# Altium PCB Smart_DCDC_v5.PCBDOC (part 2 of 2)
Units mm, origin at the board's own origin, x right, y up, seen from the top; angles counter-clockwise.
Board outline 122.55 x 122.29 mm, 2 copper layers (Top Layer, Bottom Layer); 183 components, 138 nets, 550 pads, 99 vias.
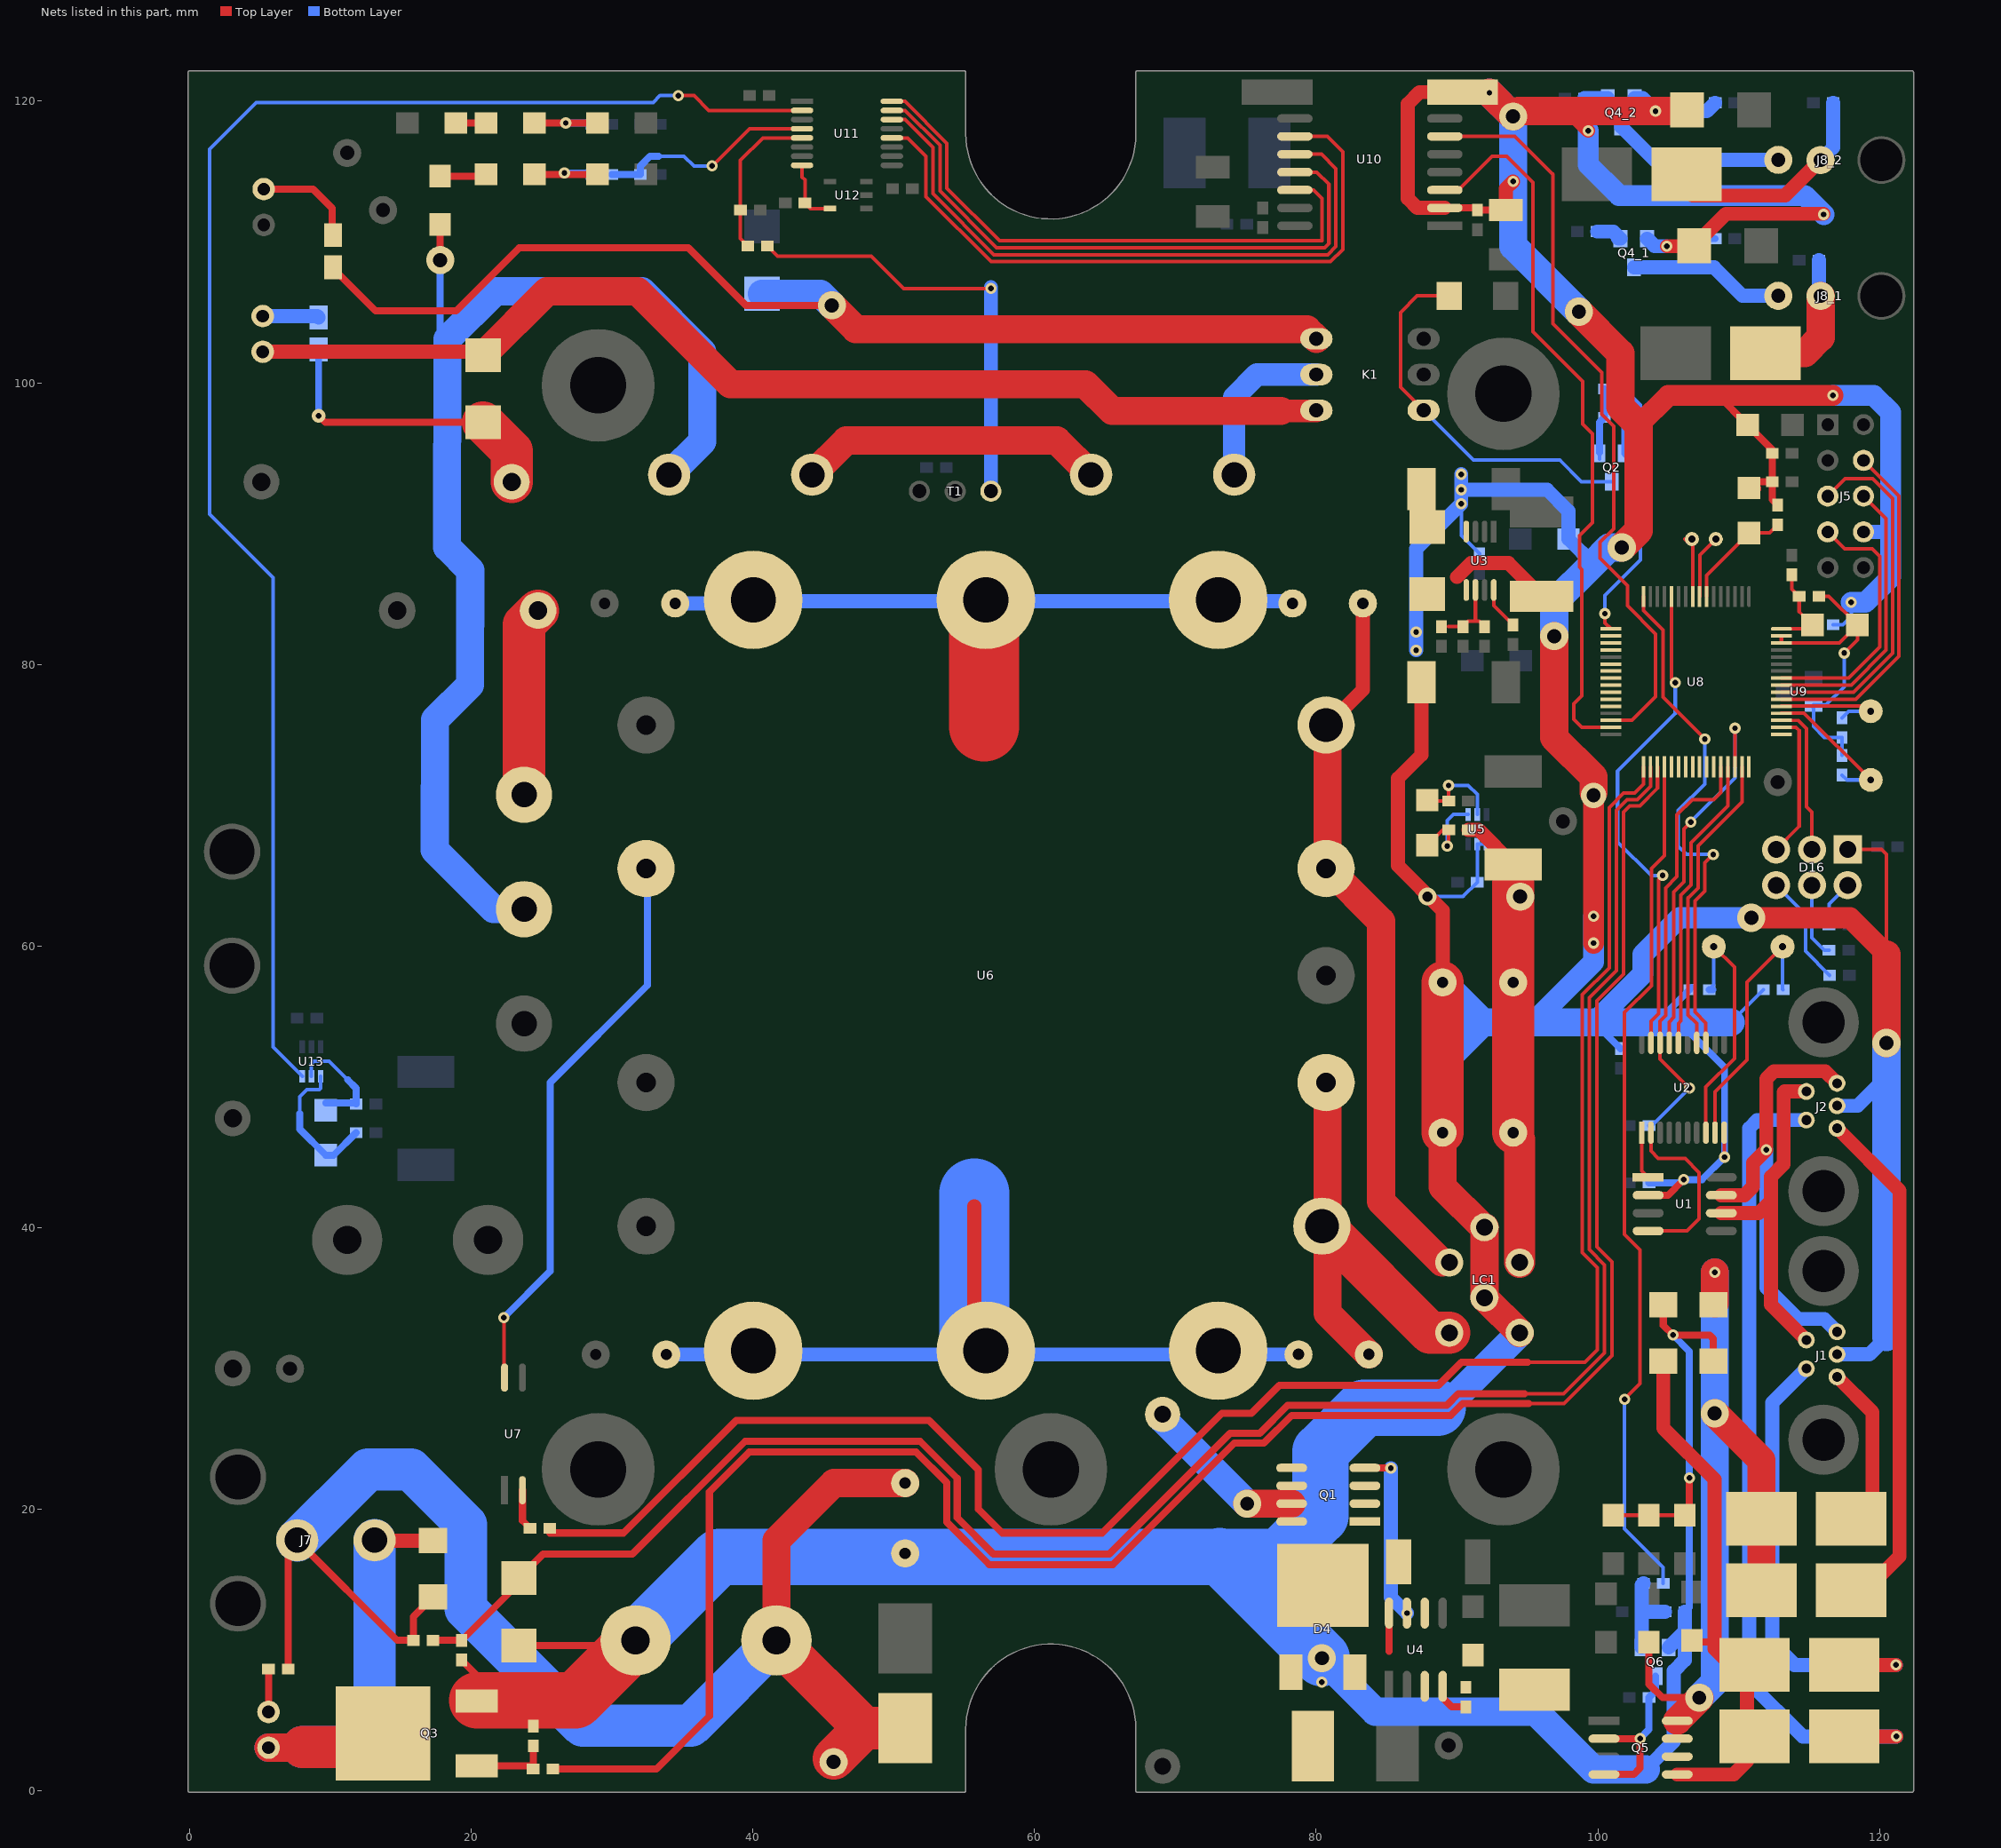
[diagram p2: the nets of this part, all layers, seen from the top]

## Via types
v1: diameter 0.8, hole 0.4, Top Layer to Bottom Layer, 80 vias
v2: diameter 2, hole 1, Top Layer to Bottom Layer, 14 vias
v3: diameter 1.27, hole 0.711, Top Layer to Bottom Layer, 3 vias
v4: diameter 1, hole 0.4, Top Layer to Bottom Layer, 1 vias
v5: diameter 1.8, hole 1, Top Layer to Bottom Layer, 1 vias

## Nets (pads, with @x,y where several pads share a name; then routed paths per layer and width w, separated by ;. In a path a pad name is that pad's centre, name@x,y a point inside that pad or via, vN(x,y) a via of type N, cw(c..) or ccw(c..) an arc to the next point about the centre after c; other vN are vias at no path point) (continued)
CAN+5V: D1.K F1.2 F3.2 Q5.5 Q5.6 R33.1 | length 37.9
  Top Layer w0.508: R33.1@106.68,10.544 108.3,10.544
  Top Layer w1: D1.K@104.648,30.512 104.648,25.752 108.3,22.1 108.3,10.544 108.3,10.064 110.285,8.079 110.6,7.764 110.6,3.844 110.6,2.1 109.643,1.143 Q5.5@105.64,1.143
CAN+12V: D2.K F2.2 F4.2 Q5.7 Q5.8 R35.1 | length 57.5
  Top Layer w0.508: R35.1@103.632,10.544 103.632,7.568 104.6,6.6 v2(107.2,6.6) ; v2@106.644,6.556 107.2,6.556 v2@107.243,6.556 ; v2@107.45,6.85 v2@107.744,6.556
  Top Layer w2: Q5.8@105.64,4.953 v2@107.243,6.556 ; v2(108.3,26.8) 111.623,23.477 F2.2@111.623,19.304 111.623,15.24 112.131,14.732 F4.2@112.639,14.224 ; D2.K@108.3,34.608 v1(108.3,36.82)
  Bottom Layer w2: v2(107.2,6.6) 108.3,7.7 v2(108.3,26.8) v1(108.3,36.82)
CAN_H: J1.4 J2.4 U1.7 | length 32.3
  Top Layer w1: U1.7@108.772,42.291 110.411,42.291 111.02,42.9 111.02,44.58 v1(111.965,45.525) 111.965,50.565 112.5,51.1 116.137,51.1 J2.4@116.992,50.244
  Bottom Layer w1: v1(111.965,45.525) 111.965,35.735 114.2,33.5 116.081,33.5 J1.4@116.992,32.588
CAN_L: J1.5 J2.5 U1.6 | length 24.5
  Top Layer w1: U1.6@108.772,41.021 111.421,41.021 112.3,41.9 ; J1.5@114.808,32.004 112.3,34.512 112.3,41.9 ; J2.5@114.808,49.66 113.26,49.66 113.2,49.6 113.2,44.5 112.3,43.6 112.3,41.9
CAN_SW: R42.1 U8.36 | length 61.2
  Top Layer w0.254: v1(101.9,27.8) 103,28.9 103,38.4 101.9,39.5 101.9,55.286 103.8,57.186 103.8,65.5 104.72,66.42 104.72,72.709 U8.36@104.733,72.72 U8.36@104.739,72.728
  Bottom Layer w0.254: v1(101.9,27.8) 101.9,18.6 104.648,15.852 R42.1@104.648,14.732
CGND: C15.2 C16.2 C20.1 C21.1 U6.0 | length 177.1
  Top Layer w1: U6.0@55.714,31.154 55.714,31.242 55.714,41.514
  Top Layer w5: 56.414,75.586 U6.0@56.414,84.494
  Bottom Layer w1: C15.2@34.464,84.328 40.02,84.328 U6.0@40.234,84.328 ; U6.0@55.714,30.98 U6.0@40.132,30.98 ; C16.2@78.312,84.494 73.04,84.494 U6.0@56.642,84.494 ; C21.1@78.74,30.98 73.04,30.98 U6.0@56.642,30.98 ; U6.0@39.204,30.98 U6.0@40.02,30.98 ; U6.0@39.204,30.98 U6.0@40.02,30.98 ; U6.0@39.204,30.98 C20.1@33.836,30.98 U6.0@39.204,30.98 ; U6.0@39.204,84.494 U6.0@40.02,84.494 ; U6.0@39.204,84.494 U6.0@40.02,84.494 ; U6.0@39.204,84.494 U6.0@40.02,84.494 ; U6.0@40.02,30.98 U6.0@40.132,30.98 ; U6.0@40.02,30.98 U6.0@40.132,30.98 ; U6.0@40.02,84.494 U6.0@40.132,84.494 ; U6.0@40.02,84.494 U6.0@40.132,84.494 ; U6.0@40.02,84.494 U6.0@40.132,84.494 ; U6.0@40.132,30.98 U6.0@56.53,30.98 ; U6.0@40.132,30.98 U6.0@56.53,30.98 ; U6.0@40.132,84.494 U6.0@56.53,84.494 ; U6.0@40.132,84.494 U6.0@56.53,84.494 ; U6.0@56.53,30.98 U6.0@56.642,30.98 ; U6.0@56.53,30.98 U6.0@56.642,30.98 ; U6.0@56.53,84.494 U6.0@56.642,84.494 ; U6.0@56.53,84.494 U6.0@56.642,84.494
  Bottom Layer w5: U6.0@55.714,31.154 55.714,31.242 55.714,42.414
CONTACT_SW: R24.1 U8.35 | length 149.5
  Top Layer w0.254: 95.093,27.492 97.607,27.492 101,30.885 101,37.56 99.92,38.64 99.92,56.106 101.82,58.006 101.82,69.498 102.268,69.946 102.988,69.946 104.239,71.197 104.239,72.72 U8.35@104.239,72.728
  Top Layer w0.508: R24.1@25.784,1.524 33.124,1.524 36.9,5.3 36.9,21.22 39.735,24.055 51.57,24.055 53.755,21.87 53.755,19.07 56.77,16.055 64.106,16.055 65.559,16.055 74.18,24.676 76.28,24.676 78.258,26.654 89.557,26.654 90.395,27.492 95.093,27.492
CONTACT_VREF: D14.K R21.1 R23.1 U8.34 | length 144.4
  Top Layer w0.254: 94.8,28.2 97.58,28.2 100.48,31.1 100.48,37.345 99.4,38.425 99.4,56.321 101.32,58.241 101.32,69.64 102.08,70.4 102.8,70.4 103.739,71.339 103.739,72.72 U8.34@103.739,72.728
  Top Layer w0.508: R21.1@17.272,10.668 R23.1@19.304,10.668 23.368,14.732 D14.K@23.368,15.085 25.083,16.8 31.427,16.8 39.427,24.8 51.879,24.8 54.5,22.179 54.5,19.379 57.079,16.8 63.85,16.8 65.303,16.8 73.887,25.384 75.987,25.384 77.965,27.362 89.263,27.362 90.101,28.2 94.8,28.2
DCDC_SW: R12.1 U8.33 | length 132.2
  Top Layer w0.254: 95.013,30.416 99.089,30.416 99.98,31.307 99.98,37.138 98.9,38.218 98.9,56.528 100.802,58.431 100.802,69.822 101.834,70.854 102.612,70.854 103.239,71.481 103.239,72.72 U8.33@103.239,72.728
  Top Layer w0.508: R12.1@25.557,18.3 30.805,18.3 38.805,26.3 52.5,26.3 56,22.8 56,20 57.7,18.3 63.347,18.3 64.8,18.3 73.3,26.8 75.4,26.8 77.378,28.778 88.677,28.778 90.315,30.416 95.013,30.416
GATEIN: U6.2 U7.4 | length 40.4
  Top Layer w0.254: U7.4@22.3,29.336 v1(22.3,33.6)
  Bottom Layer w0.5: v1(22.3,33.6) 25.6,36.9 25.6,50.3 32.512,57.212 U6.2@32.512,65.492 ; U6.2@32.512,63.485 U6.2@32.512,63.525
GND: C1.1 C2.2 C3.1 C4.1 C5.2 C6.2 C8.2 C9.2 C10.2 C11.2 C12.2 C13.1 C18.2 C19.2 C23.2 C24.2 C25.2 C26.2 C27.2 C28.2 C29.2 C30.2 C31.2 C32.2 C33.2 C34.2 C35.1 C36.1 D1.A D2.A D3.A D4.1 D14.A D15_1.A D15_2.A D16.1 J1.3 J2.3 J5.8 LC1.3 Q2.2 Q3.3 Q4_1.2 Q4_2.2 Q6.2 R16.2 R23.2 R25.1 R27_1.2 R27_2.2 R36.2 R37.2 R38.2 R39.2 R43.1 TP9.0 U1.2 U2.10 U3.4 U4.3 U4.8 U5.1 U5.2 U8.62 U8.63 U9.2 U10.2 U10.8 | length 656.2
  Top Layer w0.254: R36.2@101.092,19.561 R39.2@103.632,19.561 R37.2@106.172,19.561 106.5,19.561 R37.2@106.68,19.561 ; v1@108.974,45.026 U2.10@108.974,46.736 ; U8.63@113.039,82.028 113.039,82.02 113.039,81.528 117.164,81.528 C23.2@118.44,82.804 ; C24.2@115.697,84.836 116.408,84.836 C23.2@118.44,82.804 ; v1(117.5,80.8) 118.44,81.74 C23.2@118.44,82.804 ; D16.1@117.748,66.848 120.152,66.848 120.5,66.5 120.5,59.4
  Top Layer w0.5: U10.2@89.132,112.422 91.44,112.422 91.586,112.422 C36.1@91.59,112.418 ; C36.1@91.44,112.268 C35.1@93.472,112.268 ; U1.2@103.572,42.291 104.991,42.291 v1(106.1,43.4) ; R37.2@106.5,19.561 v1(106.5,22.2)
  Top Layer w0.508: R23.2@19.304,9.271 20.366,8.209 Q3.3@20.366,6.364 ; Q3.3@20.399,6.398 Q3.3@20.986,5.811 ; D14.A@23.368,10.315 C33.2@31.303,10.315 ; 85.171,9.881 U4.8@85.171,12.604 ; D1.A@104.648,34.512 104.648,33.052 v1(105.338,32.362) 107.938,32.362 108.204,32.096 D2.A@108.204,30.512 ; 108.536,99.1 C26.2@110.632,97.004 112.395,95.241 C27.2@112.395,94.996 C32.2@112.395,92.964 ; C28.2@110.744,92.532 111.176,92.964 C32.2@112.395,92.964 ; C28.2@111.343,92.441 C28.2@111.343,92.532 ; C29.2@112.776,91.313 112.395,91.694 C32.2@112.395,92.964
  Top Layer w1: C6.2@87.472,78.74 87.472,73.572 85.8,71.9 85.8,65.7 88.98,62.52 C18.2@88.98,57.404 ; U10.2@89.132,112.422 87.178,112.422 86.5,113.1 86.5,119.8 87.342,120.642 U10.8@90.392,120.642 U10.8@92.3,120.642 ; C35.1@93.472,112.268 93.472,113.792 v1(93.98,114.3) ; 97.92,119.3 v1(99.32,117.9) ; v1(104.9,109.7) 106.807,109.7 D15_1.A@106.835,109.728 109.107,112 v1@116.035,112 ; D15_2.A@106.247,119.3 D15_2.A@106.327,119.38
  Top Layer w1.5: v1(99.7,60.2) v1@99.7,60.52 ; v5@99.7,70.9 v5(99.7,70.7) v1(99.7,62.1) 99.7,61.4 ; 102.9,97 105,99.1 108.536,99.1 v1(116.7,99.1) ; v2(110.9,61.994) 117.906,61.994 120.5,59.4 ; v1@99.7,60.52 99.7,61.4 ; v1@99.7,60.52 99.7,61.4
  Top Layer w2: C19.2@88.98,46.736 88.98,42.88 LC1.3@91.898,39.962 ; LC1.3@91.948,40.012 LC1.3@91.948,35.012 LC1.3@94.448,32.512 ; v1(92.3,120.6) TP9.0@93.98,118.92 94.36,119.3 97.92,119.3 v1(104.1,119.3) D15_2.A@106.247,119.3 ; v2(96.9,82) 96.9,74.8 99.7,72 v5@99.7,70.9 ; v2(98.653,105.047) 101.6,102.1 101.6,98.3 102.9,97 102.9,89.5 v2(101.7,88.3) ; v2(120.5,53.1) 120.5,59.4
  Top Layer w3: C19.2@88.98,46.736 C18.2@88.98,57.404
  Top Layer w4: Q3.3@20.399,6.398 24.384,6.398 27.386,6.398 31.303,10.315 C33.2@31.656,10.668
  Bottom Layer w0.254: v3(87.9,63.5) 90.424,63.5 C13.1@91.44,64.516 U5.2@91.44,67.232 U5.1@92.09,67.232 ; v1(90.3,91.4) 90.3,89.146 C8.2@91.592,87.854 ; 109.426,54.562 C4.1@111.76,56.896 ; U9.2@115.3,76.9 115.316,76.916 115.316,75.584 116.097,74.803 C31.2@117.348,74.803 C30.2@117.348,73.533 ; U9.2@115.316,77.123 116.223,77.123 117.5,78.4 v1(117.5,80.8) ; C25.2@116.713,82.804 117.404,82.804 118,83.4 v1(118,84.4)
  Bottom Layer w0.5: 99.1,54.562 99.743,54.562 C2.2@101.6,52.705 ; C1.1@103.632,43.18 105.88,43.18 v1(106.1,43.4) 107.4,43.4 v1(109,45) 109,51.362 105.8,54.562 ; 104.186,54.562 C3.1@106.52,56.896 C3.1@106.68,57.056 ; v1(104.9,109.7) 106,109.7 106.536,110.236 R27_1.2@108.331,110.236 ; v1(105.338,32.362) 106.5,31.2 v1(106.5,22.2) 106.5,13.028 R43.1@106.172,12.7
  Bottom Layer w0.508: v2(101.7,88.3) 102.3,88.9 Q2.2@102.3,94.625 ; R16.2@101.929,97.481 Q2.2@101.929,94.996 Q2.2@102.3,94.625 ; Q2.2@101.943,94.982 Q2.2@102.3,94.625
  Bottom Layer w1: v1(87.1,81) v1(87.1,82.3) 87.1,88.2 v1(90.3,91.4) v1(90.3,92.4) ; v1(90.3,93.5) v1(90.3,92.4) ; 99.659,87.158 R38.2@97.917,88.9 97.917,90.883 96.4,92.4 v1(90.3,92.4) ; Q4_2.2@102.609,120.212 103.188,120.212 v1(104.1,119.3) 107.743,119.3 R27_2.2@108.331,119.888 ; 103.4,1.5 105.4,3.5 105.4,8.5 106.172,9.272 106.172,11.303 ; Q4_1.2@103.505,110.236 104.041,109.7 v1(104.9,109.7) ; Q6.2@105.029,10.16 106.172,11.303 ; R43.1@106.172,12.7 106.172,11.303 ; J1.3@116.992,30.988 119.288,30.988 120.5,32.2 ; J2.3@116.992,48.644 118.444,48.644 120.5,50.7 ; J5.8@118.872,89.408 120.792,89.408 120.8,89.4
  Bottom Layer w1.5: 95.4,54.562 99.7,58.862 v1(99.7,60.2) v1@99.7,60.52 ; v1(99.32,117.9) 99.32,115.48 101.5,113.3 114.7,113.3 v1(116.042,111.958) ; v1(99.7,62.1) 99.7,61.4 ; 99.743,54.562 103.2,58.019 103.2,59.4 105.794,61.994 v2(110.9,61.994) ; v1(116.7,99.1) 119.6,99.1 120.8,97.9 120.8,89.4 120.8,86.2 119,84.4 v1(118,84.4) ; v1@99.7,60.52 99.7,61.4 ; v1@99.7,60.52 99.7,61.4
  Bottom Layer w2: v2(80.4,9.4) 84.2,5.6 95.6,5.6 99.7,1.5 103.4,1.5 ; C19.2@88.98,46.736 88.98,51.72 91.822,54.562 ; C18.2@88.98,57.404 91.822,54.562 ; 89.136,27.2 LC1.3@94.448,32.512 ; v1(92.3,120.6) TP9.0@93.98,118.92 v1(93.98,114.3) 93.98,109.72 v2(98.653,105.047) ; v2(96.9,82) 96.9,84.4 99.659,87.158 100.8,88.3 v2(101.7,88.3) ; 99.1,54.562 95.4,54.562 91.822,54.562 ; 99.743,54.562 104.186,54.562 105.8,54.562 109.426,54.562 ; 120.5,32.2 120.5,50.7 v2(120.5,53.1)
  Bottom Layer w4: C33.2@31.656,10.668 37.588,16.6 77.4,16.6 80.3,19.5 80.3,24.1 83.4,27.2 88.628,27.2 ; 73.15,16.65 v2(80.4,9.4)
  other v1: 80.4,7.7
HVISENSE: U11.2 U13.6 | length 112.7
  Top Layer w0.254: v1(34.7,120.4) 35.8,120.4 36.854,119.346 U11.2@43.48,119.346
  Bottom Layer w0.254: U13.6@7.986,50.732 5.9,52.818 5.9,86.158 1.4,90.658 1.4,116.6 4.7,119.9 32.9,119.9 33.4,120.4 v1(34.7,120.4)
LEDRED: D16.3 U8.50 | length 10.5
  Top Layer w0.254: D16.3@112.668,66.848 114.3,68.48 114.3,75.3 114.072,75.528 U8.50@113.039,75.528
LEDYLW: D16.2 U8.51 | length 10.8
  Top Layer w0.254: U8.51@113.039,76.028 114.26,76.001 114.808,75.428 114.808,69.892 115.208,69.492 D16.2@115.208,66.848
MCVCC: J6.1 R17.2 R49.1 TP11.0 | length 85.4
  Top Layer w0.508: TP11.0@17.78,108.712 R49.1@17.78,111.252
  Bottom Layer w0.508: TP11.0@17.78,108.712 17.78,103.62 18.3,103.1
  Bottom Layer w2: J6.1@23.735,62.608 21.58,62.613 17.391,66.821 17.413,76.065 19.896,78.536 19.915,86.682 18.266,88.338 18.3,103.1 21.7,106.5 32.1,106.5 36.4,102.2 36.4,95.836 R17.2@34.036,93.472
"MCVCC MEASURE": C45.1 R51.1 U11.4 | length 15.8
  Top Layer w0.254: v1(37.1,115.4) 39.746,118.046 U11.4@43.48,118.046
  Bottom Layer w0.254: 33.296,116.1 35.1,116.1 35.8,115.4 v1(37.1,115.4)
  Bottom Layer w0.508: R51.1@29.972,114.808 C45.1@32.004,114.808 32.004,115.404 32.7,116.1 33.296,116.1
NetC3_2: C3.2 U2.8 Y1.1 | length 18.1
  Top Layer w0.254: U2.8@107.674,46.736 107.674,49.974 109.7,52 109.7,58.485 Y1.1@108.241,59.944
  Bottom Layer w0.254: C3.2@107.917,56.896 108.241,57.22 Y1.1@108.241,59.944
  Bottom Layer w0.5: C3.2@107.917,56.896 C3.2@108.167,56.896
NetC4_2: C4.2 U2.9 Y1.2 | length 18.3
  Top Layer w0.254: U2.9@108.324,46.736 108.324,49.624 110.6,51.9 110.6,57.423 Y1.2@113.121,59.944
  Bottom Layer w0.254: Y1.2@113.121,59.944 113.121,56.932 C4.2@113.157,56.896
NetC7_2: C7.2 R3.2 R4.2 U3.6 | length 5.1
  Top Layer w0.254: 89.408,82.677 C7.2@90.424,82.677 90.8,83.053 91.308,83.053 ; U3.6@91.308,85.282 91.308,83.053 ; R4.2@91.948,82.677 91.572,83.053 91.308,83.053
NetC11_1: C11.1 U4.4 | length 2.7
  Top Layer w0.508: U4.4@88.981,7.404 88.981,6.571 89.612,5.94 C11.1@90.632,5.94
NetC14_1: C14.1 R6.1 U5.4 | length 6.6
  Top Layer w0.254: C14.1@87.884,67.156 88.976,68.248 R6.1@89.408,68.248 89.408,67.208 v1(89.3,67.1)
  Bottom Layer w0.254: v1(89.3,67.1) 89.3,68.9 89.732,69.332 U5.4@90.79,69.332
NetC14_2: C14.2 R7.1 U5.5 | length 6.6
  Top Layer w0.254: C14.2@87.884,70.864 88.138,70.61 88.468,70.28 R7.1@89.408,70.28 89.408,71.392 v1(89.4,71.4)
  Bottom Layer w0.254: v1(89.4,71.4) 90.8,71.4 91.44,70.76 U5.5@91.44,69.332
NetC16_1: C16.1 LC1.1 U6.5 U6.6 | length 52.6
  Top Layer w1: U6.5@79.884,75.604 80.336,76.056 U6.5@80.392,76.112 ; U6.5@80.812,75.692 83.312,78.192 C16.1@83.312,84.328
  Top Layer w2: U6.6@79.884,65.416 80.254,65.046 U6.6@80.29,65.01 ; U6.6@79.884,65.444 79.884,65.492 U6.6@79.884,65.532 ; U6.5@80.812,75.692 80.812,65.532 84.6,61.744 84.6,41.852 LC1.1@88.94,37.512
NetC18_1: C18.1 C19.1 LC1.4 R6.2 R8.2 TP6.0 | length 31.3
  Top Layer w0.254: R6.2@90.8,68.4 R6.2@90.805,68.4
  Top Layer w1: R6.2@90.805,68.248 91.518,68.248 R8.2@93.98,65.786
  Top Layer w2.2: C19.1@93.98,46.736 94.448,46.268 LC1.4@94.448,37.512
  Top Layer w3: C19.1@93.98,46.736 C18.1@93.98,57.404 93.98,64.454
NetC21_2: C21.2 LC1.2 U6.8 U6.9 | length 32.6
  Top Layer w2: U6.8@80.812,50.292 80.812,40.092 80.812,39.792 80.812,33.916 C21.2@83.74,30.988
  Top Layer w3: U6.9@80.512,40.092 80.812,39.792 88.092,32.512 LC1.2@89.448,32.512
NetC22_1: C22.1 R11.2 U13.4 | length 10.3
  Bottom Layer w0.254: 7.8,48.1 7.8,49.3 8.3,49.8 9.2,49.8 9.286,49.886 U13.4@9.286,50.732
  Bottom Layer w0.5: 7.8,48.1 7.8,46.988 C22.1@9.652,45.136 10.211,45.136 R11.2@11.811,46.736
NetC22_2: C22.2 R10.2 U13.5 | length 8.2
  Bottom Layer w0.254: U13.5@8.636,50.732 8.636,51.636 8.8,51.8 9.9,51.8 11.2,50.5
  Bottom Layer w0.5: C22.2@9.652,48.844 11.735,48.844 R10.2@11.811,48.768 11.811,49.889 11.2,50.5
NetC23_1: C23.1 C24.1 R13.1 U8.64 | length 6.5
  Top Layer w0.254: U8.64@113.039,82.528 114.964,82.528 C23.1@115.24,82.804 114.3,83.744 C24.1@114.3,84.836 113.792,85.344 R13.1@113.792,86.36
NetC33_1: C33.1 C34.1 D12.K F6.2 J7.1 R21.2 R22.2 TP12.0 | length 106.7
  Top Layer w0.508: R22.2@6.985,8.636 6.985,17.145 J7.1@7.62,17.78 14.732,10.668 R21.2@15.875,10.668 15.875,12.351 D12.K@17.272,13.748
  Top Layer w2: C33.1@41.656,10.668 41.656,17.756 45.744,21.844 C34.1@50.8,21.844
  Top Layer w3: C33.1@41.656,10.668 47.889,4.435 ; TP12.0@45.72,2.266 47.889,4.435 ; F6.2@50.8,4.435 47.889,4.435
  Bottom Layer w3: J7.1@7.62,17.78 12.64,22.8 15.7,22.8 19.6,18.9 19.6,12.9 27.9,4.6 35.588,4.6 C33.1@41.656,10.668
NetC43_1: C43.1 U11.8 U12.5 | length 5.2
  Top Layer w0.254: U11.8@43.48,115.446 43.48,114.62 43.688,114.412 C43.1@43.688,112.776 44.088,112.376 U12.5@45.462,112.376 45.004,112.376
NetC46_1: C46.1 R53.1 U11.5 | length 11.3
  Top Layer w0.254: R53.1@39.624,109.728 39.1,110.252 39.1,115.8 40.696,117.396 U11.5@43.48,117.396
NetD3_K: D3.K L1.1 U3.5 | length 7.4
  Top Layer w1: 90,86.2 91,87.2 93.648,87.2 L1.1@96.012,84.836
NetD4_2: D4.2 L2.1 Q1.5 Q1.6 Q1.7 Q1.8 | length 12
  Top Layer w2: v2(75.1,20.381) Q1.7@78.256,20.381
  Bottom Layer w2: L2.1@69.088,26.724 69.088,26.393 v2(75.1,20.381)
NetD6_A: D6.A K1.3 Q2.3 | length 27
  Top Layer w0.254: K1.3@87.63,98.044 86,99.674 86,105 87.172,106.172 D6.A@89.44,106.172
  Bottom Layer w0.254: K1.3@87.63,98.044 91.174,94.5 97.3,94.5 98.836,92.964 Q2.3@100.989,92.964
NetD7_A: D7.A D9.K K1.6 | length 80.1
  Top Layer w1: D9.K@5.176,102.2 D7.A@20.7,102.2
  Top Layer w1.6: 77.5,98 K1.6@80.01,98
  Top Layer w2: D7.A@20.828,101.953 25.375,106.5 31.8,106.5 38.4,99.9 63.6,99.9 65.5,98 77.5,98
NetD7_K: D7.K D8.K R19.2 | length 21.6
  Top Layer w0.5: v4(9.144,97.656) 9.617,97.183 D7.K@20.8,97.183
  Top Layer w3: D7.K@20.828,97.183 22.86,95.151 D8.K@22.86,92.964
  Bottom Layer w0.5: v4(9.144,97.656) R19.2@9.144,102.362
NetD9_A: D9.A R19.1 | length 4
  Bottom Layer w1: D9.A@5.176,104.74 9.052,104.74 R19.1@9.144,104.648
NetD10_K: D10.K K1.4 R20.1 | length 81
  Top Layer w0.504: R20.1@10.16,108.14 13.2,105.1 18.9,105.1 23.4,109.6 35.4,109.6 39.5,105.5 v2(45.6,105.5)
  Top Layer w2: v2(45.6,105.5) 47.3,103.8 79.334,103.8 K1.4@80.01,103.124
  Bottom Layer w2: D10.K@40.64,106.327 44.773,106.327 v2(45.6,105.5)
NetD11_A: D11.A R20.2 | length 7.2
  Top Layer w0.508: D11.A@5.248,113.756 8.744,113.756 10.1,112.4 R20.2@10.1,110.6
NetD12_A: D12.A D13.K J7.2 Q3.2 | length 34.6
  Top Layer w1: J7.2@13.152,17.748 D12.A@17.272,17.748
  Top Layer w2: D13.K@5.588,3.048 7.948,3.048 8,3.1
  Top Layer w3: 8,3.1 12.752,3.1 Q3.2@13.716,4.064 Q3.2@13.12,4.66
  Bottom Layer w2: D13.K@5.588,3.048 7.948,3.048 8,3.1
  Bottom Layer w3: 8,3.1 11.1,3.1 13.12,5.12 J7.2@13.12,17.78
NetD13_A: D13.A R22.1 | length 3
  Top Layer w0.508: D13.A@5.588,5.588 R22.1@5.588,8.636
NetD16_4: D16.4 R29.2 | length 8
  Bottom Layer w0.254: D16.4@112.668,64.308 114.754,62.222 114.754,59.617 R29.2@116.459,57.912
NetD16_5: D16.5 R30.2 | length 5.3
  Bottom Layer w0.254: D16.5@115.208,64.308 115.208,60.592 116.096,59.704 R30.2@116.415,59.704
NetD16_6: D16.6 R31.2 | length 3.4
  Bottom Layer w0.254: R31.2@116.415,61.496 116.415,62.975 D16.6@117.748,64.308
NetF1_1: F1.1 J1.1 | length 33.6
  Top Layer w1: F1.1@117.501,8.924 v1(121.176,8.924)
  Bottom Layer w1: J1.1@114.808,29.972 112.4,27.564 112.4,10.5 113.976,8.924 v1(121.176,8.924)
NetF2_1: F2.1 J1.2 | length 11.7
  Top Layer w1: J1.2@116.992,29.388 119.5,26.88 119.5,20.811 F2.1@117.993,19.304
NetF3_1: F3.1 J2.1 | length 59.4
  Top Layer w1: F3.1@117.501,3.844 v1(121.2,3.844)
  Bottom Layer w1: J2.1@114.808,47.628 111.328,47.628 110.75,47.05 110.75,7.65 114.556,3.844 v1(121.2,3.844)
NetF4_1: F4.1 J2.2 | length 35.7
  Top Layer w1: J2.2@116.992,47.044 121.425,42.611 121.425,16.64 F4.1@119.009,14.224
NetF5_2: F5.2 J3.1 | length 13.5
  Top Layer w3: J3.1@23.735,70.736 23.735,82.823 F5.2@24.732,83.82
NetF7_1_2: F7_1.2 J8_1.1 R26_1.2 | length 9.8
  Top Layer w2: F7_1.2@111.897,102.108 114.708,102.108 115.824,103.224 J8_1.1@115.824,106.172
  Bottom Layer w1: J8_1.1@115.697,106.299 R26_1.2@115.697,108.712
NetF7_2_2: F7_2.2 J8_2.1 R26_2.2 | length 16.4
  Top Layer w1: F7_2.2@105.413,114.624 105.769,114.268 106.737,113.3 113.3,113.3 J8_2.1@115.824,115.824
  Bottom Layer w1: J8_2.1@115.824,115.824 116.713,116.713 R26_2.2@116.713,119.888
NetJ8_1_2: J8_1.2 Q4_1.3 | length 11.1
  Bottom Layer w1: Q4_1.3@102.565,108.204 108.252,108.204 110.274,106.182 J8_1.2@112.814,106.182
NetJ8_2_2: J8_2.2 Q4_2.3 | length 12.1
  Bottom Layer w1: Q4_2.3@101.669,118.18 104.015,115.834 J8_2.2@112.814,115.834
NetK1_5: K1.5 R18.1 | length 12
  Bottom Layer w1.6: R18.1@74.168,93.472 74.168,98.968 75.784,100.584 K1.5@80.01,100.584
NetQ1_1: Q1.1 Q1.2 Q1.3 R5.1 U4.6
NetQ1_4: Q1.4 U4.7 | length 12.6
  Top Layer w0.508: Q1.4@83.456,22.921 v1@85.279,22.921
  Bottom Layer w1: v1(85.3,22.9) 85.3,13.745 v1(86.441,12.604)
NetQ2_1: Q2.1 R15.1 R16.1 | length 5.1
  Bottom Layer w0.254: Q2.1@100.128,94.572 Q2.1@100.128,95.044
  Bottom Layer w0.508: Q2.1@100.128,95.044 100.128,97.188 R16.1@100.476,97.536 R15.1@100.476,99.568
NetQ3_1: Q3.1 R24.2 R25.2 | length 5.8
  Top Layer w0.508: Q3.1@20.366,1.764 R24.2@24.147,1.764 ; R25.2@24.384,3.175 24.384,1.764 R24.2@24.147,1.764 ; R24.2@24.387,1.524 R24.2@24.147,1.764
NetQ4_1_1: Q4_1.1 R28_1.2 | length 2.1
  Bottom Layer w1: R28_1.2@99.949,110.744 101.092,110.744 Q4_1.1@101.6,110.236 101.464,110.236 Q4_1.1@101.4,110.3
NetQ4_2_1: Q4_2.1 R28_2.2 | length 1.7
  Bottom Layer w1: R28_2.2@99.053,120.212 Q4_2.1@100.704,120.212
NetQ5_2: Q5.2 Q5.4 Q6.3 R40.1 | length 12.3
  Top Layer w0.508: Q5.4@100.44,1.143 102.543,1.143 103,1.6 v1(103,3.7) ; Q5.2@100.44,3.683 v1@102.983,3.683
  Bottom Layer w0.508: v1(103,3.7) 103.632,4.332 R40.1@103.632,6.604 104.089,7.061 Q6.3@104.089,8.128
NetQ6_1: Q6.1 R41.1 R42.2 R43.2 | length 6.3
  Bottom Layer w1: Q6.1@103.124,10.16 R41.1@103.124,12.7 ; R42.2@103.251,14.732 103.124,14.605 R41.1@103.124,12.7 ; R43.2@104.775,12.7 R41.1@103.124,12.7
NetR2_1: R2.1 U3.8 | length 3
  Top Layer w0.254: U3.8@92.608,85.282 92.608,84.176 R2.1@93.98,82.804
NetR12_2: R12.2 U7.2 | length 2.9
  Top Layer w0.508: U7.2@23.622,21.336 23.622,19.177 R12.2@24.16,18.639
NetR17_1: R17.1 R18.2 | length 21.8
  Top Layer w2: R17.1@44.196,93.472 46.624,95.9 61.58,95.9 R18.2@64.008,93.472
NetR45_2: R45.2 R46.1 | length 2.2
  Top Layer w0.5: R45.2@18.885,118.452 R46.1@21.044,118.452
NetR46_2: R46.2 R47.2 R48.1 | length 6.3
  Top Layer w0.508: R46.2@24.473,118.452 v1(26.7,118.452) R48.1@28.956,118.452
  Bottom Layer w0.508: v1(26.7,118.452) R47.2@28.487,118.452
NetR49_2: R49.2 R50.1 | length 3.3
  Top Layer w0.508: R49.2@17.78,114.681 20.917,114.681 R50.1@21.044,114.808
NetR50_2: R50.2 R51.2 R52.1 | length 6.4
  Top Layer w0.508: R50.2@24.473,114.808 R52.1@28.956,114.808
  Bottom Layer w0.508: v1(26.6,114.9) R51.2@28.483,114.9
NetR53_2: R53.2 T1.2 | length 31.6
  Top Layer w0.254: R53.2@41.021,109.728 41.749,109 48.4,109 50.7,106.7 v1(56.9,106.7)
  Bottom Layer w1: T1.2@56.896,92.299 v1@56.896,106.8
NetU1_1: U1.1 U2.1 | length 3.4
  Top Layer w0.254: U2.1@103.124,46.736 103.124,44.009 U1.1@103.572,43.561
NetU1_4: U1.4 U2.2 | length 12.6
  Top Layer w0.254: U1.4@103.572,39.751 106.351,39.751 107.2,40.6 107.2,43.9 106.2,44.9 104.3,44.9 103.774,45.426 U2.2@103.774,46.736
NetU10_11: U10.11 U11.12 | length 48.5
  Top Layer w0.254: U11.12@49.86,117.396 50.981,117.396 52.274,116.103 52.274,113.226 56.9,108.6 81.021,108.6 81.9,109.479 81.9,116.4 80.798,117.502 U10.11@78.482,117.502
NetU10_12: U10.12 U11.14 | length 46.5
  Top Layer w0.254: U11.14@49.86,118.696 50.798,118.696 52.774,116.72 52.774,113.426 57.1,109.1 80.814,109.1 81.4,109.686 81.4,115.2 80.368,116.232 U10.12@78.482,116.232
NetU10_13: U10.13 U11.15 | length 44.9
  Top Layer w0.254: U11.15@49.86,119.346 50.802,119.346 53.274,116.874 53.274,113.626 57.3,109.6 80.607,109.6 80.9,109.893 80.9,114.1 80.038,114.962 U10.13@78.482,114.962 U10.13@79.338,114.962
NetU10_14: U10.14 U11.16 | length 41.7
  Top Layer w0.254: U11.16@49.86,119.996 50.794,119.996 53.774,117.016 53.774,113.826 57.5,110.1 80.4,110.1 80.4,113.1 79.808,113.692 U10.14@78.482,113.692
P1.0: U2.19 U8.12 | length 35.7
  Top Layer w0.254: U2.19@103.774,53.116 103.774,54.649 104.32,55.195 104.32,64.72 v1(104.6,65)
  Top Layer w0.256: U8.12@105.239,84.828 105.239,84.82 105.239,78.961 v1(105.5,78.7)
  Bottom Layer w0.254: v1(104.6,65) 103.8,65 101.4,67.4 101.4,72.42 105.5,76.52 v1(105.5,78.7)
P1.4: U2.13 U8.16 | length 37.4
  Top Layer w0.254: U8.16@103.239,84.828 103.239,84.82 103.239,83.821 104.62,82.44 104.62,77.68 v1(107.6,74.7) ; U2.13@107.62,53.17 U2.13@107.674,53.116 107.674,54.526 106.9,55.3 106.9,63.2 107.6,63.9 107.6,65.9 v1(108.2,66.5)
  Bottom Layer w0.254: v1(107.6,74.7) 107.6,71.5 105.72,69.62 105.72,67.08 106.3,66.5 v1(108.2,66.5)
P1.5: R15.2 U8.17 | length 18.8
  Top Layer w0.254: v1(100.5,83.6) 100.5,82.954 U8.17@100.933,82.52
  Bottom Layer w0.254: v1(100.5,83.6) 100.5,84.9 103.027,87.427 103.027,98.414 R15.2@101.873,99.568
P1.6: U8.18
P1.7: U8.19
P2.0: U8.20
P2.2: U8.22
P2.3: U8.23
P2.4: U8.24
P2.5: U8.25
P2.6: U8.26
P2.7: U8.27
P3.0: U8.28
P3.2: U8.30 U10.6 | length 53.6
  Top Layer w0.254: U10.6@89.132,117.502 94.108,117.502 96.8,114.81 96.8,104.2 100.273,100.727 100.273,97.75 101.12,96.903 101.12,89.636 100.151,88.667 100.151,88.649 100.151,87.549 100.954,86.746 ; 100.9,86.8 102.1,85.6 102.1,84.16 104.1,82.16 104.1,77.7 102.428,76.028 U8.30@100.939,76.028
P3.3: U8.31 U10.3 | length 51.5
  Top Layer w0.254: U10.3@89.132,113.692 90.1,113.692 92.5,116.092 93.524,116.092 95.39,114.226 95.39,103.616 98.911,100.095 98.911,97.083 99.62,96.374 99.62,90.062 98.7,89.142 98.7,86.9 98.872,86.728 98.872,77.772 98.3,77.2 98.3,76.1 98.872,75.528 U8.31@100.939,75.528
P4.1: U8.37
P4.2: U8.38
P4.3: U8.39
P4.4: U8.40
P4.5: U8.41
P4.6: U8.42
P4.7: U8.43
P5.0: R1.1 U2.18 U8.44 | length 30.3
  Top Layer w0.254: v1(106.5,49.9) 104.424,51.976 U2.18@104.424,53.116 104.424,54.649 104.82,55.045 104.82,64.12 105.62,64.92 105.62,69.32 106.7,70.4 108.238,70.4 108.739,70.901 108.739,72.72 U8.44@108.739,72.728
  Bottom Layer w0.254: R1.1@103.632,47.244 103.844,47.244 v1(106.5,49.9)
P5.1: U2.16 U8.45 | length 21.1
  Top Layer w0.254: U2.16@105.724,53.116 105.724,54.5 105.9,54.676 105.9,63.62 106.62,64.34 106.62,67.34 109.239,69.959 109.239,72.72 U8.45@109.239,72.728
P5.2: U2.17 U8.46 | length 27
  Top Layer w0.254: U2.17@105.074,53.116 105.074,54.594 105.4,54.92 105.4,63.82 106.12,64.54 106.12,68.32 v1(106.6,68.8) ; U8.46@109.739,72.728 v1(109.739,75.461)
  Bottom Layer w0.254: v1(106.6,68.8) 109.739,71.939 v1(109.739,75.461)
P5.3: U2.14 U8.47 | length 21.6
  Top Layer w0.254: U2.14@106.92,53.22 U2.14@107.024,53.116 107.024,54.476 106.4,55.1 106.4,63.4 107.12,64.12 107.12,67.12 110.239,70.239 110.239,72.72 U8.47@110.239,72.728
P5.4: U8.48
P5.5: U8.49
TCK: J5.7 U8.57 | length 18.7
  Top Layer w0.254: U8.57@113.039,79.028 117.808,79.028 120.027,81.247 120.027,87.673 119.5,88.2 117.54,88.2 J5.7@116.332,89.408
TDI: J5.5 U8.55 | length 25.7
  Top Layer w0.254: U8.55@113.039,78.028 118.178,78.028 120.935,80.785 120.935,91.783 119.525,93.193 117.577,93.193 J5.5@116.332,91.948
TDO: J5.4 U8.54 | length 24.6
  Top Layer w0.254: U8.54@113.039,77.528 118.328,77.528 121.389,80.589 121.389,91.971 J5.4@118.872,94.488
TMS: J5.6 U8.56 | length 20.1
  Top Layer w0.254: U8.56@113.039,78.528 118.008,78.528 120.481,81.001 120.481,90.339 J5.6@118.872,91.948
VREF: C28.1 C29.1 U8.7 | length 8
  Top Layer w0.254: U8.7@107.739,84.828 107.739,86.327 C28.1@110.744,89.332 112.192,89.332 C29.1@112.776,89.916
XT1IN: U8.8 Y2.2 | length 4.5
  Top Layer w0.254: U8.8@107.239,84.828 107.239,87.759 Y2.2@108.38,88.9
XT1OUT: U8.9 Y2.1 | length 4.4
  Top Layer w0.254: 106.172,88.9 Y2.1@106.426,88.646 ; U8.9@106.739,84.828 Y2.1@106.739,88.9
XT2IN: C31.1 U8.53 Y3.1 | length 8.7
  Top Layer w0.254: U8.53@113.039,77.028 119.023,77.028 Y3.1@119.38,76.671
  Bottom Layer w0.254: C31.1@117.348,76.2 117.819,76.671 Y3.1@119.38,76.671
XT2OUT: C30.1 U8.52 Y3.2 | length 10.5
  Top Layer w0.254: U8.52@113.039,76.528 114.643,76.528 Y3.2@119.38,71.791
  Bottom Layer w0.254: C30.1@117.348,72.136 117.693,71.791 Y3.2@119.38,71.791
pads on no net: H1.1 H2.1 H3.1 H4.1 H5.1 J1.0 J2.0 J5.1 J5.9 J5.10 J7.0 J8_1.0 J8_2.0 K1.2 U1.5 U1.8 U2.3 U2.4 U2.5 U2.6 U2.7 U2.11 U2.12 U2.15 U3.2 U3.3 U6.3 U6.7 U10.7 U11.13 U12.1

## Polygon pours and split planes (outlines as drawn)
GND on Bottom Layer "POLYGND" (solid, pour order 1000): 2.5,26.5 2.5,25.7 0.4,23.6 0.4,1.9 1.8,0.5 53.1,0.5 54.2,1.6 54.2,6.7 59,11.5 63.3,11.5 68,6.8 68,2.3 69.4,0.9 119.4,0.9 121.5,3 121.5,119.1 119.2,121.4 88,121.4 86.7,120.1 86.7,28.5 84.6,26.4 84.5,26.5 2.5,26.5

## Keep-outs
Keep-Out Layer:
  lines w0.254: 54.98,4.365 54.98,0 0,0 0,122.04 54.98,122.04 54.98,117.675 ; 54.985,4.365 cw(c61.15,4.365) 67.315,4.365 ; 54.985,117.675 ccw(c61.15,117.675) 67.315,117.675 ; 67.31,4.365 67.31,0 122.3,0 122.3,122.04 67.31,122.04 67.31,117.675

## Other copper
Top Layer:
  rectangle net CAN+5V: 104.5,0.7 108,2.8
  rectangle net CAN+12V: 104.4,3.4 108,5.4
  rectangle net GND: 87.2,6.1 88.2,9.1
  rectangle net NetQ1_1: 85.1,18.2 87.1,20.3
  rectangle net NetQ1_1: 82.3,18.152 85.9,22.052
  rectangle net CGND: 37.5,36.3 75.6,79.4
  rectangle net GND: 77.1,0.6 83.6,11.052
  rectangle net GND: 90,6.852 98,10.9
  rectangle net GND: 82.9,8.952 90.1,10.9
  rectangle net NetD4_2: 76.8,16.552 79.7,22.921
  rectangle net NetQ1_1: 87.3,11.452 88.1,18.852
  rectangle net NetQ1_1: 85.1,14.652 88.1,18.852
  rectangle net 12V: 88.5,11.352 98,18.2
  rectangle net GND: 86.5,88.4 90.9,94
  rectangle net 3V3: 92.4,88.6 96.6,94.1
  rectangle net NetD3_K: 86.3,84.4 90.9,86.5
  rectangle net 12V: 89,77.1 95,81.9
  rectangle net GND: 86.2,77.1 87.9,82.9
  rectangle net 12V: 99,4.5 101.7,7.9
  rectangle net GND: 117.4,82 119.7,85
Bottom Layer:
  rectangle net BATTGND: 41.6,111.8 54.4,121.5
  rectangle net BATTGND: 75,107 84.3,121.7
  rectangle net CGND: 37.1,35.9 76.1,79.8

## Silkscreen, mask and mechanical layers (free items; w line width, h text height)
Top Overlay:
  lines w1: 0,27.3 84.4,27.3 85.5,28.4 85.5,33.7 ; 85.5,32 85.5,122.1
  text "BATTVCC" at 7.2,119.3 h0.8
  text "DISCHARGE" at 0.7,116.4 h1
  text "GND" at 93.5,115.5 h0.8
  text "BATTGND" at 11.3,108.8 h0.8
  text "MCVCC" at 14.1,105.4 h0.8
  text "SMART DC-DC 2009" at 32.2,103 h1.6
  text "UNIT 01 - TEST TYPE" at 58.1,102.9 h1
  text "IRVING S. TJIPTOWARSONO &" at 33.7,100.6 h1.52
  text "PRECHARGE" at 0.7,99 h1
  text "DAVID C. A. SNOWDON" at 33.6,98 h1.52
  text "3V3" at 108.7,68.7 h0.8
  text "BATTVCC" at 18.9,67.2 h1
  text "12V" at 99.4,66.4 h0.8
  text "VICOROUT" at 97.1,63.1 h0.8
  text "MCVCC" at 19.4,59 h1
  text "BATTGND" at 19.4,50.9 h1
  text "Solar racing is awesome." at 39.5,37.3 h1.5
  text "-IN" at 8.7,29.5 h0.8
  text "BORDER OF HIGH      AND LOW VOLTAGE" at 35.5,24.4 h1.52
  text "12V" at 121.9,16.4 h1 r90
  text "CAN SIDE" at 121.7,9.8 h0.8 r90
  text "5V" at 121.7,5.5 h1 r90
  text "5V" at 91.1,2 h0.8
  text "CONTACTOR+" at 47.2,0.7 h0.8
Bottom Overlay:
  lines w1: 0,27.3 84.4,27.3 85.5,28.4 85.5,122.04
  text "R49 IS USED AS ICOUPLER LOAD" at 84.4,109.4 h0.8
  text "READ ICOUPLER DATASHEET FOR DETAILS" at 84.5,108.2 h0.8
  text "FROM BATTGND" at 78,102.7 h1
  text "MCVCC" at 78,100.1 h1
  text "FROM BATTVCC" at 78,97.4 h1
  text "SMART DC-DC" at 50.3,96.8 h1.5
  text "BORDER OF HIGH AND LOW VOLTAGE" at 84.9,82.2 h1.52 r90
  text "POPULATE EITHER R40 OR R41" at 92.6,17.2 h1
  text "BUT NOT BOTH" at 92.6,15.667 h1
  text "POPULATE R40 TO MAKE CAN ON BY DEFAULT" at 92.6,14.133 h1
  text "R41 TO MAKE CAN OFF BY DEFAULT" at 92.6,12.6 h1
Mechanical 1:
  lines w0.254: 54.98,4.365 54.98,0 0,0 0,122.04 54.98,122.04 54.98,117.675 ; 54.985,4.365 cw(c61.15,4.365) 67.315,4.365 ; 54.985,117.675 ccw(c61.15,117.675) 67.315,117.675 ; 67.31,4.365 67.31,0 122.3,0 122.3,122.04 67.31,122.04 67.31,117.675
Mechanical 16:
  lines w0.127: -81.9,2.28 -76.82,2.28 ; -81.9,50.54 -76.82,50.54 ; -81.9,98.8 -76.82,98.8 ; -8.875,-45.98 -8.875,-40.9 ; -8.875,141.98 -8.875,147.06 ; 49.42,203.9 54.5,203.9 ; 64.15,-45.98 64.15,-40.9 ; 64.15,141.98 64.15,147.06 ; 90.82,-33.28 205.12,-33.28 ; 90.82,-25.66 205.12,-25.66 ; 90.82,-18.04 128.92,-18.04 ; 128.92,-40.9 128.92,-25.66 128.92,-10.42 ; 137.175,-45.98 137.175,-40.9 ; 137.175,141.98 137.175,147.06 ; 182.26,-40.9 182.26,-25.66 ; 205.12,50.54 210.2,50.54 ; 90.82,-40.9 55.26,-40.9 55.26,-10.42 90.82,-10.42 ; 90.82,-40.9 205.12,-40.9 ; 90.82,-40.9 90.82,-10.42 ; 90.82,-10.42 128.92,-10.42 ; 128.92,-10.42 205.12,-10.42 205.12,-40.9 ; 205.12,-40.9 -76.82,-40.9 -76.82,141.98 205.12,141.98 205.12,-40.9 ; -81.9,-45.98 210.2,-45.98 210.2,147.06 -81.9,147.06 -81.9,-45.98
  text "1" at -45.654,143.631 h1.78
  text "2" at 26.99,143.631 h1.78
  text "3" at 100.142,143.631 h1.78
  text "4" at 173.04,143.631 h1.78
  text "A" at -79.995,120.619 h1.78
  text "A" at 207.025,120.619 h1.78
  text "B" at -79.995,72.562 h1.78
  text "B" at 207.025,72.562 h1.78
  text "C" at -79.995,24.048 h1.78
  text "ENGINEER:" at 92.09,-12.96 h1.14
  text "TITLE:" at 130.19,-12.96 h1.14
  text "IRVING S. TJIPTOWARSONO" at 93.995,-16.262 h1.78
  text "SMART DC-DC" at 139.207,-19.945 h5.08
  text "PCB DESIGNER:" at 92.09,-20.453 h1.14
  text "Sunswift" at 58.054,-20.834 h5.08
  text "IRVING S. TJIPTOWARSONO" at 93.995,-23.755 h1.78
  text "D" at -79.995,-23.958 h1.78
  text "D" at 207.025,-23.958 h1.78
  text "DATE:" at 92.09,-28.2 h1.14
  text "PART NO.:" at 130.19,-28.2 h1.14
  text "REV:" at 183.53,-28.2 h1.14
  text "Room 109" at 59.07,-30.74 h1.78
  text "Number" at 139.969,-31.121 h1.78
  text ".PRINT_DATE" at 93.36,-31.248 h1.78
  text "Rev" at 187.848,-31.375 h1.78
  text "EE Building" at 59.07,-33.28 h1.78
  text "UNSW, Sydney Australia" at 59.07,-35.82 h1.78
  text "FILE NAME:" at 92.09,-35.82 h1.14
  text "DWG NO:" at 130.19,-35.82 h1.14
  text "SCALE:" at 183.53,-35.82 h1.14
  text "2052" at 59.07,-38.36 h1.78
  text "Number" at 140.604,-38.36 h1.78
  text "Scale" at 188.991,-38.487 h1.78
  text ".PCB_FILE_NAME_NO_PATH" at 93.36,-38.868 h1.78
  text "1" at -45.654,-44.329 h1.78
  text "2" at 26.99,-44.329 h1.78
  text "3" at 100.142,-44.329 h1.78
  text "4" at 173.04,-44.329 h1.78

## Text inside footprints (layer, text, board x,y; h text height)
C17: Top Overlay "+" at 3.976,38.116 h2
C18: Top Overlay "+" at 98.38,58.204 h1.52 r180
C19: Top Overlay "+" at 98.38,47.536 h1.52 r180
C33: Top Overlay "+" at 47.2,6.4 h2 r180
C34: Top Overlay "+" at 44.716,23.3 h1.52 r270
ID1: Bottom Overlay "ID" at 68.988,43.322 h1.52
J1: Top Overlay "131-040" at 111.455,33.198 h0.76 r270
J2: Top Overlay "131-040" at 111.455,50.854 h0.76 r270
J5: Top Overlay "2" at 118.364,99.568 h1.27 r270; Top Overlay "1" at 114.3,99.1 h1.27 r270; Top Overlay "10" at 120.5,87.8 h1.27 r270